# EAGLE board FNC-connector-PMOD-MUX (EAGLE 9.6.2)
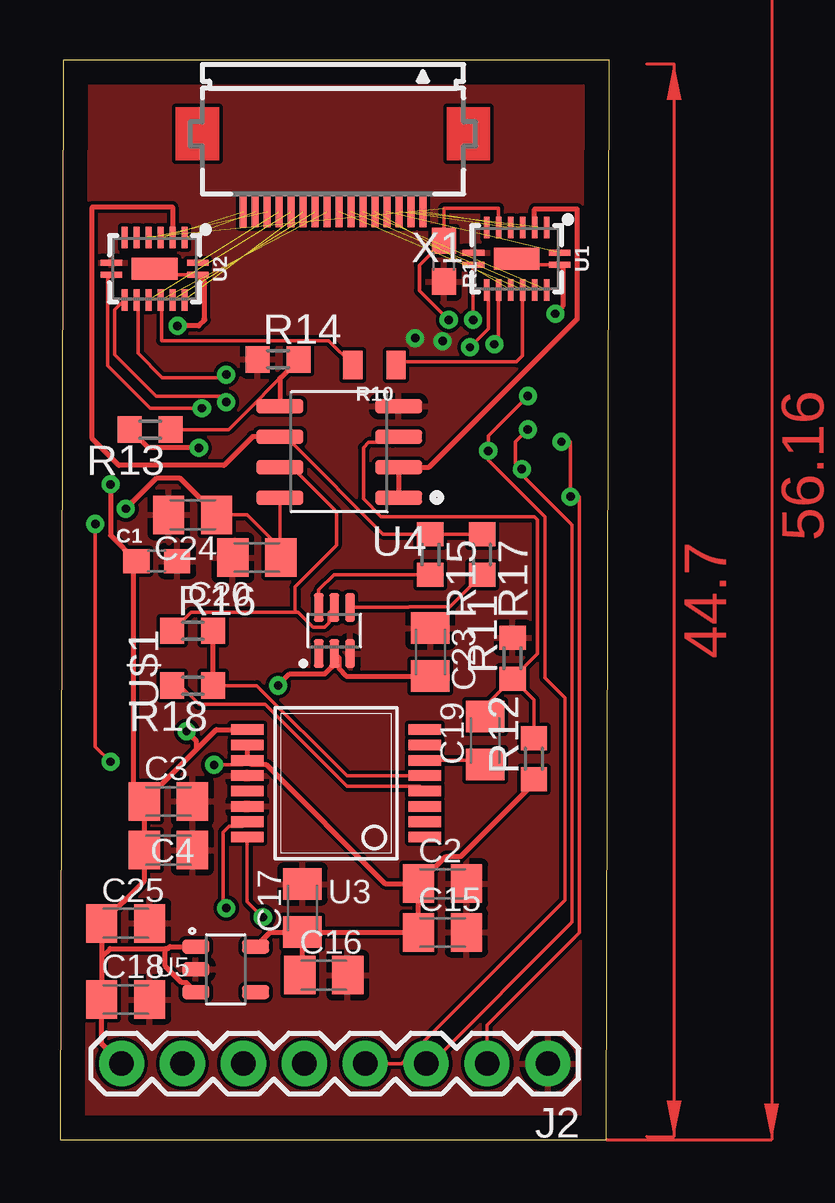
[diagram p0: board, top side]
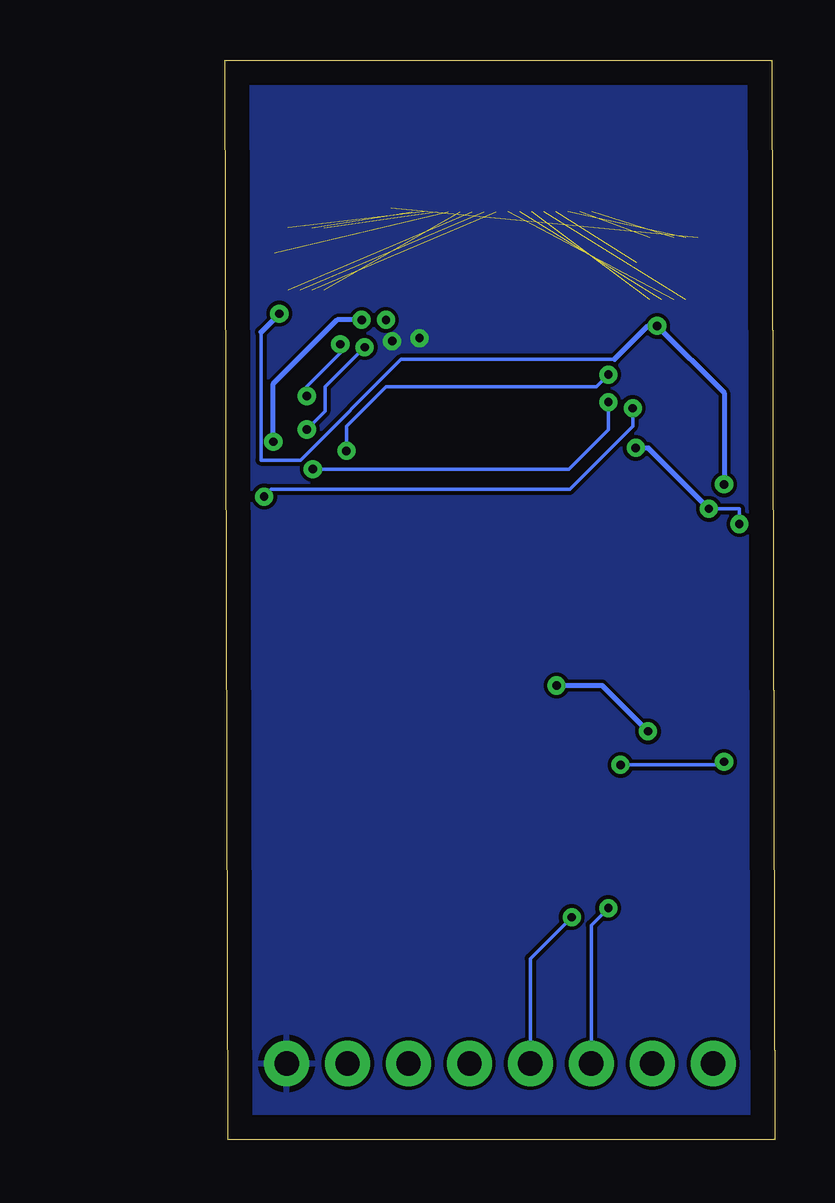
[diagram p1: board, bottom side, seen from below]

Size 22.92 x 44.99 mm. Coordinates in mm from the lower left corner, seen from the top.
Outline: 0,0 22.79,0 22.92,44.99 0.13,44.99 0,0
Copper layers (1*16): Top 0.035mm / dielectric 1.5mm / Bottom 0.035mm
Design rules "default": minimum track width 6mil, minimum drill 0.35mm, track to track 6mil, track to pad 6mil, pad to pad 6mil, via to via 6mil, smd to smd 6mil, copper to edge 40mil, drill to drill 6mil, minimum pad ring 10mil, minimum via ring 8mil, stop-mask expansion 4mil, vias tented up to drill 0mil, thermal gap 10mil

## Footprints (pad centres in the part's own frame; a part is rotated, then mirrored left to right if it is on the bottom)
0603 = smd 1.1 x 1: 1 -0.85,0; 2 0.85,0
C0805K = smd 1.3 x 1.6: 1 -1,0; 2 1,0
1X08_ROUND = drill 1.016 pad 1.88: 1 0,0; 2 2.54,0; 3 5.08,0; 4 7.62,0; 5 10.16,0; 6 12.7,0; 7 15.24,0; 8 17.78,0
0805 = smd 0.8 x 1.2: 1 -0.9,0; 2 0.9,0
R0603 = smd 1 x 1.1: 1 -0.85,0; 2 0.85,0
DHVQFN-16-2.5X3.5MM = smd 0.9 x 0.24: 1 -1.8,-0.25; 8 1.8,-0.25; 9 1.8,0.25; 16 -1.8,0.25 | smd 0.24 x 0.9: 2 -1.25,-1.3; 3 -0.75,-1.3; 4 -0.25,-1.3; 5 0.25,-1.3; 6 0.75,-1.3; 7 1.25,-1.3; 10 1.25,1.3; 11 0.75,1.3; 12 0.25,1.3; 13 -0.25,1.3; 14 -0.75,1.3; 15 -1.25,1.3 | smd 1.9 x 0.9: EP 0,0
SSOP16 = smd 0.44 x 1.34: 1 -2.24,-3.7; 2 -1.6,-3.7; 3 -0.96,-3.7; 4 -0.32,-3.7; 5 0.32,-3.7; 6 0.96,-3.7; 7 1.6,-3.7; 8 2.24,-3.7; 9 2.24,3.7; 10 1.6,3.7; 11 0.96,3.7; 12 0.32,3.7; 13 -0.32,3.7; 14 -0.96,3.7; 15 -1.6,3.7; 16 -2.24,3.7
SOIC-8 = smd 1.97 x 0.6: 1 -2.475,1.905; 2 -2.475,0.635; 3 -2.475,-0.635; 4 -2.475,-1.905; 5 2.475,-1.905; 6 2.475,-0.635; 7 2.475,0.635; 8 2.475,1.905
SOT95P280X100-5N = smd 1.14 x 0.59: 1 -1.245,0.95; 2 -1.245,0; 3 -1.245,-0.95; 4 1.245,-0.95; 5 1.245,0.95
SOT65P210X110-6N = smd 1.19 x 0.4: 1 -0.96,0.65; 2 -0.96,0; 3 -0.96,-0.65; 4 0.96,-0.65; 5 0.96,0; 6 0.96,0.65
FH12-16S-0.5SH = smd 0.3 x 1.3: 1 -3.75,3.25; 2 -3.25,3.25; 3 -2.75,3.25; 4 -2.25,3.25; 5 -1.75,3.25; 6 -1.25,3.25; 7 -0.75,3.25; 8 -0.25,3.25; 9 0.25,3.25; 10 0.75,3.25; 11 1.25,3.25; 12 1.75,3.25; 13 2.25,3.25; 14 2.75,3.25; 15 3.25,3.25; 16 3.75,3.25

## Placement (x,y rotation side)
C1  0.1uF  [0603]  4.03,24.1 0 top
C2  0.1uF  [C0805K]  15.95,10.67 0 top
C3  10uF  [C0805K]  4.52,14.1 0 top
C4  0.1uF  [C0805K]  4.52,12.06 0 top
C15  10uF  [C0805K]  15.95,8.64 0 top
C16  10uF  [C0805K]  11,6.86 0 top
C17  0.1uF  [C0805K]  10.11,9.65 90 top
C18  0.1uF  [C0805K]  2.74,5.84 0 top
C19  47nF  [C0805K]  17.73,16.64 90 top
C20  10uF  [C0805K]  8.2,24.26 180 top
C23  0.1uF  [C0805K]  15.44,20.32 270 top
C24  0.1uF  [C0805K]  5.54,26.04 180 top
C25  10uF  [C0805K]  2.74,9.02 0 top
J2  [1X08_ROUND]  20.35,3.17 180 top
R1  10k  [0603]  16,36.61 270 top
R10  300  [0805]  13.11,32.28 180 top
R11  49.9K  [R0603]  18.87,20.07 90 top
R12  49.9K  [R0603]  19.76,15.88 90 top
R13  49.9K  [R0603]  3.76,29.59 180 top
R14  49.9K  [R0603]  9.09,32.51 0 top
R15  20  [R0603]  15.44,24.38 270 top
R16  20K  [R0603]  5.54,21.21 0 top
R17  100K  [R0603]  17.6,24.38 270 top
R18  20K  [R0603]  5.54,18.92 180 top
U1  74HC4051BQ  [DHVQFN-16-2.5X3.5MM]  19.04,36.71 180 top
U2  74HC4051BQ  [DHVQFN-16-2.5X3.5MM]  3.95,36.29 180 top
U3  AD5933  [SSOP16]  11.51,14.85 90 top
U4  AD8606  [SOIC-8]  11.64,28.66 180 top
U5  ADP150  [SOT95P280X100-5N]  6.91,7.1 0 top
U$1  ADG849THROUHG_HOLE  [SOT65P210X110-6N]  11.44,21.22 90 top
X1  FH12-16S-0.5SH  [FH12-16S-0.5SH]  11.38,41.91 180 top

## Library data of the parts
C1 = SparkFun-Capacitors; PROD_ID: CAP-00810
C2-C4 C15-C20 C23-C25 = rcl; SPICEPREFIX: C
J2 = SparkFun-Connectors; PROD_ID: CONN-08437
R1 = SparkFun-Resistors; PROD_ID: RES-00824
R10 = SparkFun-Resistors; PROD_ID: RES-11622
R11-R18 = rcl; SPICEPREFIX: R
U1 U2 = 8mux; PROD_ID: IC-13334
U3 = PMODIA
U4 = Updated PMODIA; AVAILABILITY: In Stock; CHECK_PRICES: https://www.snapeda.com/parts/AD8606ARZ/Analog+Devices/view-part/?ref=eda; DESCRIPTION: Precision, Low Noise, RRIO, CMOS Op Amp (Dual); MF: Analog Devices; MP: AD8606ARZ; PACKAGE: SOIC-8 Analog Devices; PRICE: None; PURCHASE-URL: https://www.snapeda.com/api/url_track_click_mouser/?unipart_id=43414&manufacturer=Analog Devices&part_name=AD8606ARZ&search_term=ad8606; SNAPEDA_LINK: https://www.snapeda.com/parts/AD8606ARZ/Analog+Devices/view-part/?ref=snap
U5 = Updated PMODIA; AVAILABILITY: In Stock; CHECK_PRICES: https://www.snapeda.com/parts/ADP150AUJZ-2.0-R7/Analog+Devices/view-part/?ref=eda; DESCRIPTION: Ultralow Noise, 150 mA CMOS Linear Regulator; MF: Analog Devices; MP: ADP150AUJZ-2.0-R7; PACKAGE: TSOT-5 Analog Devices; PRICE: None; PURCHASE-URL: https://www.snapeda.com/api/url_track_click_mouser/?unipart_id=1225884&manufacturer=Analog Devices&part_name=ADP150AUJZ-2.0-R7&search_term=adp150; SNAPEDA_LINK: https://www.snapeda.com/parts/ADP150AUJZ-2.0-R7/Analog+Devices/view-part/?ref=snap
U$1 = Updated_PMODIA_V2
X1 = con-hirose; MPN: FH12-16S-0.5SH(55); OC_FARNELL: 1324546; OC_NEWARK: 34M6162

## Nets
E: R1.1 U1.6 U2.6
GND: C1.2 C2.2 C3.2 C4.2 C15.2 C16.2 C17.2 C18.2 C20.2 C23.1 C24.2 C25.2 J2.1 R1.2 R11.2 R14.1 U1.8 U2.8 U3.12 U3.14 U4.4 U5.2 U$1.3
INBP: R13.1 R14.2 U4.5
N$1: C19.1 U3.6
N$3: C19.2 R11.1 R12.2 U4.3
N$5: R18.2 U3.4
N$6: R15.2 U$1.6
N$8: U3.13
N$9: R17.2 U$1.4
N$11: R16.1 U4.7 U$1.5
S0: J2.4 U1.11 U2.11
S1: J2.3 U1.10 U2.10
S2: J2.2 U1.9 U2.9
SCL: J2.5 U3.16
SDA: J2.6 U3.15
SEL: U$1.1
VCC: C1.1 C3.1 C4.1 C18.1 C23.2 C25.1 J2.8 U1.16 U1.EP U2.16 U2.EP U3.9 U5.1 U5.3 U$1.2
VCC3V0: C2.1 C15.1 C16.1 C17.1 C20.1 C24.1 R12.1 R13.2 U3.10 U3.11 U4.8 U5.5
VIN: R16.2 R18.1 U3.5
Y0: R10.1 U1.13 X1.8
Y1: U1.14 X1.7
Y2: U1.15 X1.6
Y3: U1.12 X1.5
Y4: U1.1 X1.4
Y5: U1.5 X1.3
Y6: U1.2 X1.2
Y7: U1.4 X1.1
Y20: R10.2 U2.13 X1.9
Y21: U2.14 X1.10
Y22: U2.15 X1.11
Y23: U2.12 X1.12
Y24: U2.1 X1.13
Y25: U2.5 X1.14
Y26: U2.2 X1.15
Y27: U2.4 X1.16
Z: U1.3 U4.1 U4.2
Z2: R15.1 R17.1 U2.3 U4.6

## Tracks (layer width: path | path; a pad name or v marks a point on that pad's centre or on a via)
E  (via drill 0.35)  (1 unrouted)
  Top 0.152: U1.6 18.29,38.81 16,38.81 R1.1 14.99,36.44 14.99,35.38 v16.21,34.16
GND  (via drill 0.35)
  other vias: 15.95,33.27 14.81,33.4
  pour Bottom: 0.2,0.13 0.2,56.26 22.81,56.26 23.32,55.75 23.32,0.76 22.68,0.13
  pour Top: 0.2,0.13 0.2,56.01 -0.05,56.26 23.44,56.26 23.44,0 0.46,0 0.33,0.13
INBP
  Top 0.152: R13.1 7.02,29.59 R14.2
  Top 0.203: R14.2 9.17,31.74 U4.5
N$1
  Top 0.152: U3.6 17.56,15.81 C19.1
N$3
  Top 0.152: C19.2 17.73,18.07 R11.1 | U4.3 13.89,29.06 12.87,29.06 12.65,28.84 12.65,26.7 13.39,25.96 19.77,25.96 19.91,25.83 19.91,20.25 R11.1 | R11.1 19.76,18.33 R12.2
N$5
  Top 0.152: U3.4 15.02,14.72 11.98,14.72 8.55,18.14 5.79,18.14 5.01,18.92 R18.2
N$6
  Top 0.152: R15.2 11.42,23.53 10.79,22.91 U$1.6
N$9
  Top 0.152: U$1.4 14.53,22.18 14.55,22.2 16.27,22.2 R17.2
N$11
  Top 0.152: U$1.5 11.22,21.96 11.22,21.55 11.03,21.36 10.55,21.36 9.92,21.99 9.8,21.99 | 9.8,21.99 5.47,21.99 R16.1 | U4.7 9.4,27.79 9.91,27.79 11.53,26.17 11.53,24.77 9.8,23.04 9.8,21.99
S0  (via drill 0.35)
  Top 0.152: 18.24,33.27 v18.11,33.15 18.29,33.33 U1.11 | U2.11 3.25,34.94 3.25,32.77 4.27,31.75 6.81,31.75 v6.93,31.88 | v19.51,30.99 17.86,29.34 v17.86,28.7 17.86,28.31 20.21,25.95 20.21,19.25 21.05,18.41 21.05,9.97 14.25,3.17 J2.4
  Bottom 0.152: v18.11,33.15 18.11,32.77 19.51,31.37 v19.51,30.99 | v6.93,31.88 7.44,31.37 16.21,31.37 17.86,29.72 v17.86,28.7
S1  (via drill 0.35)
  Top 0.152: v17.09,33.02 17.86,33.78 17.86,35.34 U1.10 | U2.10 2.29,34.58 2.29,32.71 4.01,30.99 6.68,30.99 v6.93,30.73 | J2.3 15.47,3.17 21.35,9.05 21.35,25.62 19.15,27.83 v19.25,27.94 19,28.19 19,29.08 v19.51,29.59
  Bottom 0.152: v19.51,29.59 18.75,30.35 18.75,31.37 v17.09,33.02 | v19.25,27.94 8.59,27.94 6.93,29.59 v6.93,30.73
S2  (via drill 0.35)
  Top 0.152: U1.9 17.22,36.46 v17.22,34.16 | U2.9 1.98,35.88 1.98,32.26 3.76,30.48 v5.92,30.48 | v20.9,29.08 21.29,29.08 v21.29,26.8 21.66,26.8 21.66,8.63 17.81,4.77 J2.2
  Bottom 0.152: v5.92,30.48 5.92,29.72 8.54,27.1 20.99,27.1 v21.29,26.8
  Bottom 0.203: v20.9,29.08 20.9,31.5 18.24,34.16 v17.22,34.16
SCL  (via drill 0.35)
  Top 0.152: U3.16 7.81,9.92 v8.46,9.27
  Bottom 0.152: v8.46,9.27 10.19,7.54 J2.5
SDA  (via drill 0.35)
  Top 0.152: U3.15 7.62,13.06 7.05,13.06 6.81,12.82 6.81,9.78 v6.93,9.65
  Bottom 0.152: v6.93,9.65 7.65,8.94 J2.6
VCC  (via drill 0.35)
  Top 0.152: U2.16 4.2,36.04 U2.EP | U1.16 19.29,36.46 U1.EP
  Top 0.203: J2.8 1.74,4 C18.1 1.74,7.62 | 1.74,7.62 C25.1 3.52,10.79 C4.1 C3.1 | U5.1 4.58,8.05 4.5,7.96 4.39,7.96 | 1.74,7.62 2.09,7.96 4.39,7.96 | U5.3 5.26,6.55 5.08,6.55 4.39,7.23 4.39,7.96 | C3.1 5.67,16.25 | 5.67,16.25 6.51,17.09 U3.9 | U$1.2 11.64,20.06 11.64,19.94 | 11.64,19.94 11.64,19.62 11.93,19.32 C23.2 | C3.1 3.04,14.57 3.04,23.96 C1.1 2.11,25.18 v2.11,27.3 | 11.64,19.94 11.57,19.94 11.04,19.41 9.58,19.41 v9.09,18.92 | v5.28,17.02 5.67,16.63 5.67,16.25 | v4.9,33.91 5.79,33.91 6.05,34.16 6,34.21 6,35.79 U2.16 | v20.65,34.42 20.97,34.73 20.97,36.33 U1.16
  Bottom 0.152: 6.68,32.51 15.57,32.51 19.76,28.32 21.41,28.32 21.41,33.66
  Bottom 0.203: v5.28,17.02 7.19,18.92 v9.09,18.92 | v2.11,27.3 2.11,31.11 v4.9,33.91 5.28,33.91 6.68,32.51 | v20.65,34.42 21.41,33.66
VCC3V0  (via drill 0.35)
  Top 0.152: C24.1 7.81,26.04 9.2,24.64 C20.1 9.17,24.29 U4.8 | v1.47,25.65 1.47,16.38 v2.11,15.75 | U3.11 7.62,15.62 v6.43,15.62
  Top 0.203: U5.5 8.76,8.65 C17.1 | C16.1 10.11,6.97 C17.1 | U3.10 U3.11 7.98,15.64 8.59,15.64 13.56,10.67 14.94,10.67 | 14.94,10.67 C2.1 16.09,11.81 16.71,11.81 19.51,14.6 19.51,15.02 R12.1 | 14.94,10.67 14.95,10.65 C15.1 10.13,8.64 C17.1 | v5.79,28.83 3.67,28.83 R13.2 | C24.1 5.01,27.56 4.01,27.56 v2.74,26.29
  Bottom 0.152: v2.74,26.29 1.47,26.29 v1.47,25.65 | v6.43,15.62 2.24,15.62 v2.11,15.75
  Bottom 0.203: v5.79,28.83 5.28,28.83 v2.74,26.29
VIN
  Top 0.152: R18.1 8.2,18.92 11.96,15.17 U3.5
  Top 0.203: R18.1 R16.2
Y0  (1 unrouted)
  Top 0.152: R10.1 14.14,32.41 19.04,32.41 19.29,32.66 U1.13
Y1  (1 unrouted)
Y2  (1 unrouted)
Y3  (1 unrouted)
Y4  (1 unrouted)
Y5  (1 unrouted)
Y6  (1 unrouted)
Y7  (1 unrouted)
Y20  (1 unrouted)
  Top 0.152: U2.13 4.24,34.95 4.24,33.3 11.2,33.3 R10.2
Y21  (1 unrouted)
Y22  (1 unrouted)
Y23  (1 unrouted)
Y24  (1 unrouted)
Y25  (1 unrouted)
Y26  (1 unrouted)
Y27  (1 unrouted)
Z
  Top 0.203: U1.3 19.79,38.77 21.55,38.77 21.55,34.19 15.39,28.02 U4.2 U4.1
Z2
  Top 0.152: U4.6 9.4,29.06 9.65,29.06 13.48,25.23 R15.1 R17.1
  Top 0.203: U4.6 8.03,29.29 6.84,28.1 2.45,28.1 1.35,29.2 1.35,38.86 4.7,38.86 U2.3
(copper drawn outside any net)
  shapes: Top area x2